# EAGLE board 13777-ESP32_GPS_Motion_Shield-Panel_v10 (EAGLE 7.7.0), part 1 of 6
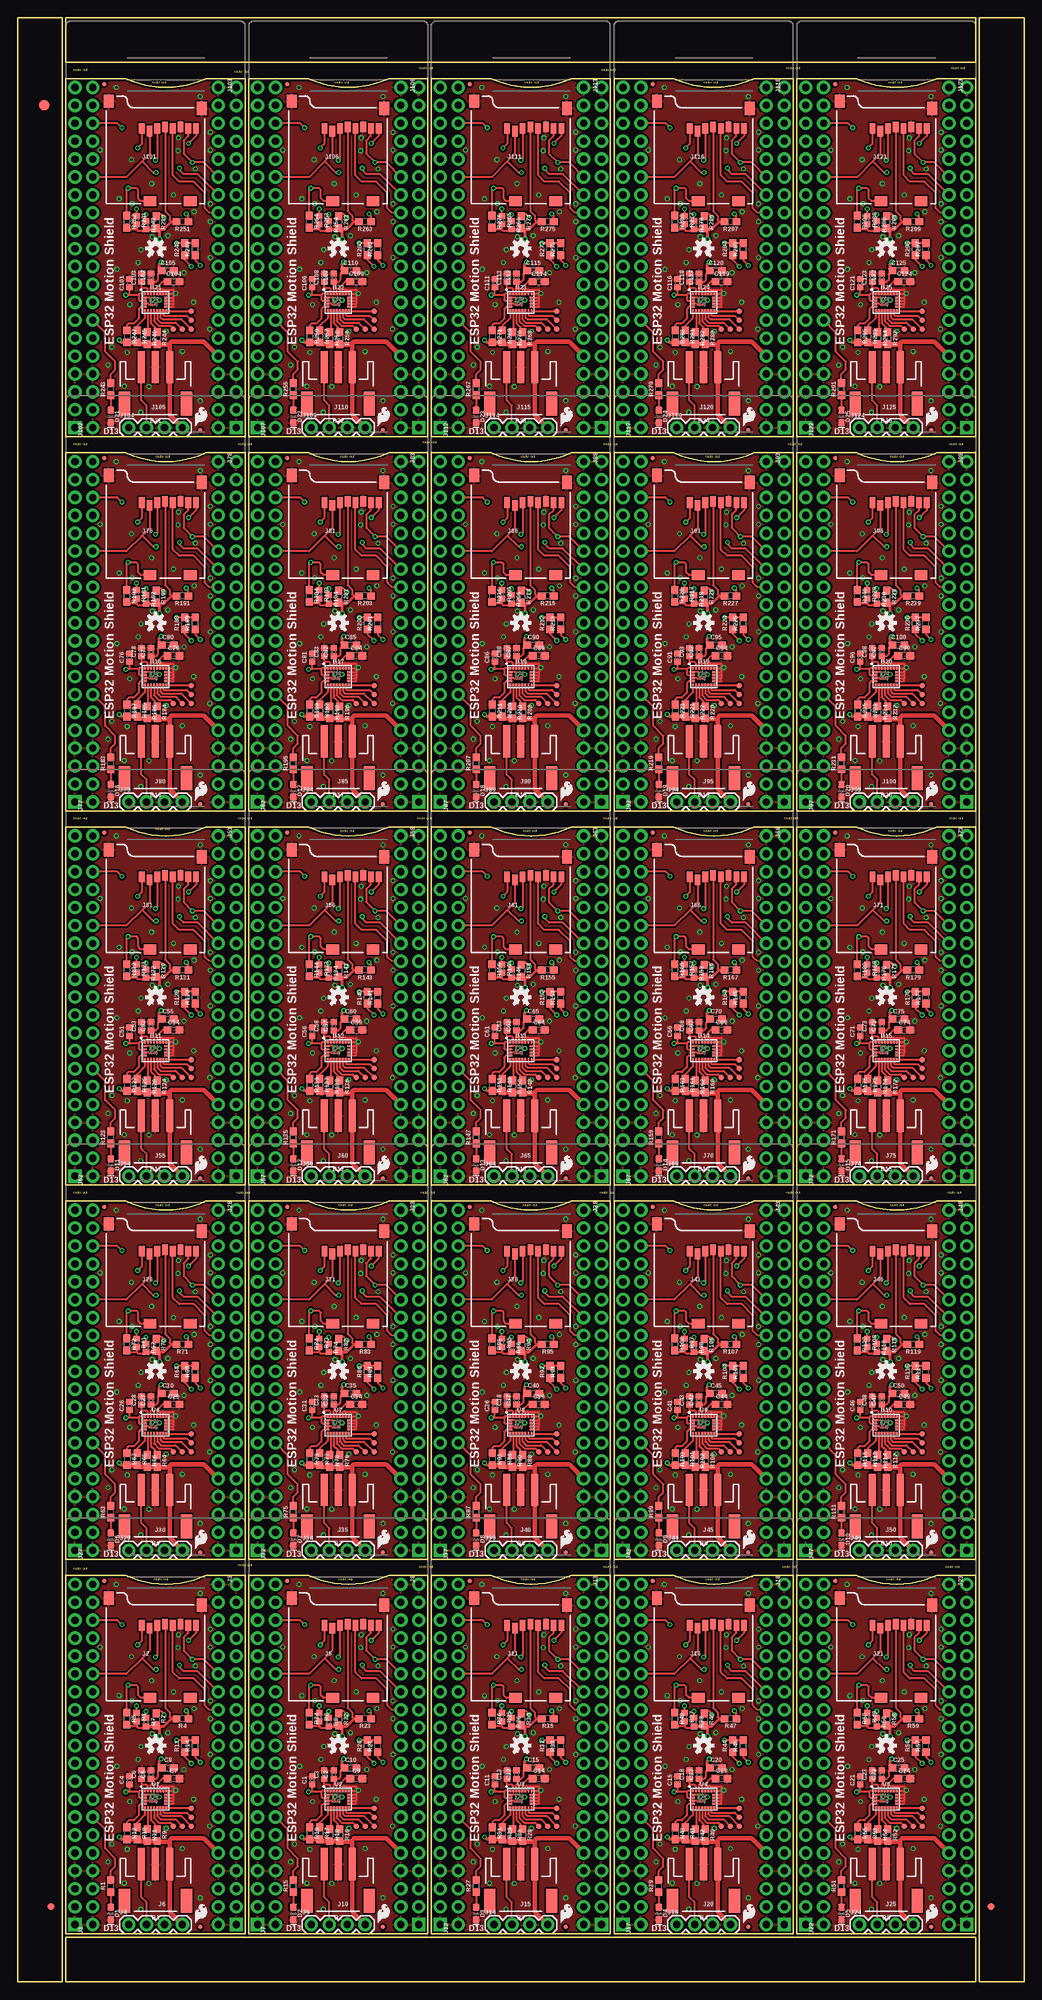
[diagram p0: board, top side]
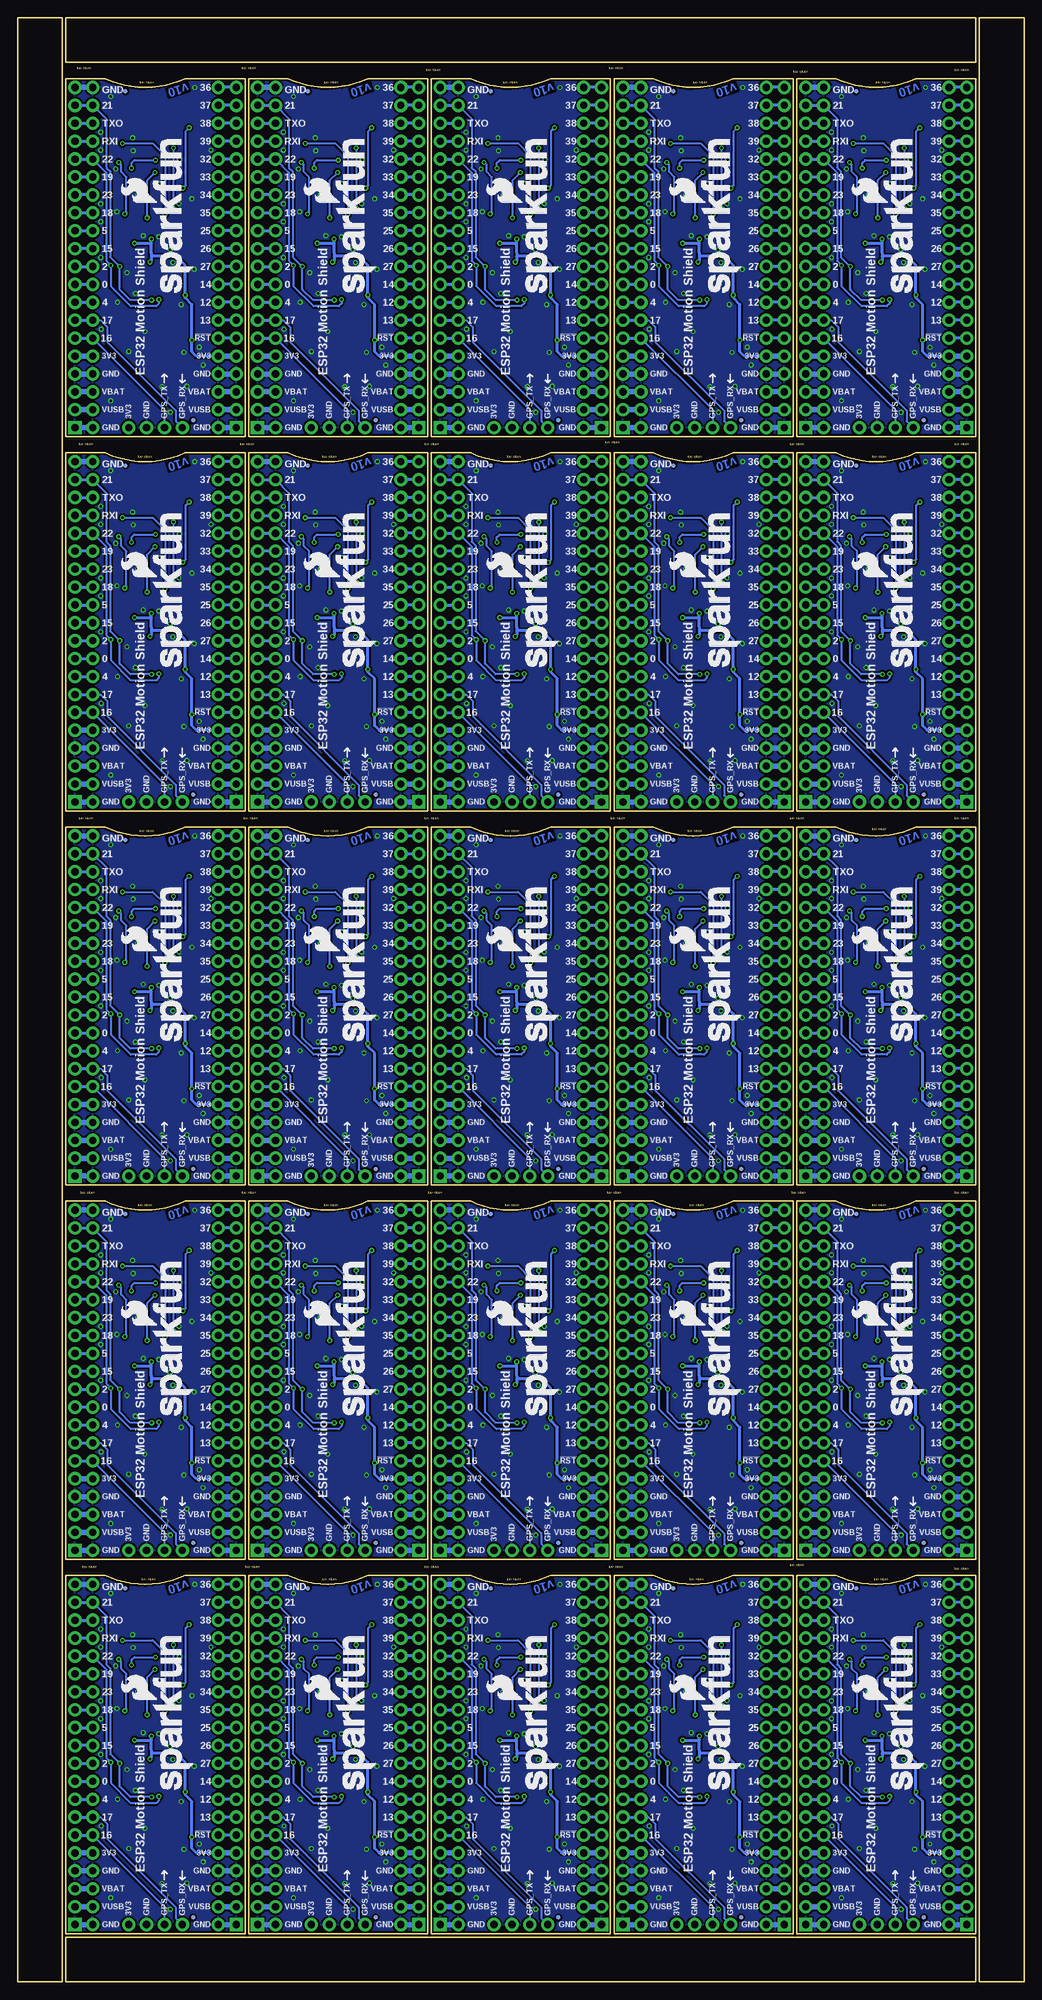
[diagram p1: board, bottom side, seen from below]

Size 142.75 x 278.64 mm. Coordinates in mm from the lower left corner, seen from the top.
Outline: 224 segments
Copper layers (1*16): Top 0.035mm / dielectric 1.5mm / Bottom 0.035mm
Design rules "SparkFun-2-layer-TIGHT *": minimum track width 7mil, minimum drill 13mil, track to track 7mil, track to pad 7mil, pad to pad 7mil, via to via 7mil, smd to smd 7mil, copper to edge 7mil, drill to drill 7mil, minimum pad ring 7mil, minimum via ring 7mil, stop-mask expansion 4mil, vias tented up to drill 25mil, thermal gap 10mil

## Footprints (pad centres in the part's own frame; a part is rotated, then mirrored left to right if it is on the bottom)
ESP32_THING_NO_ANT = drill 1.016 pad 1.88 square: 1 1.27,1.27; 40 24.13,1.27 | drill 1.016 pad 1.88: 2 1.27,3.81; 3 1.27,6.35; 4 1.27,8.89; 5 1.27,11.43; 6 1.27,13.97; 7 1.27,16.51; 8 1.27,19.05; 9 1.27,21.59; 10 1.27,24.13; 11 1.27,26.67; 12 1.27,29.21; 13 1.27,31.75; 14 1.27,34.29; 15 1.27,36.83; 16 1.27,39.37; 17 1.27,41.91; 18 1.27,44.45; 19 1.27,46.99; 20 1.27,49.53; 21 24.13,49.53; 22 24.13,46.99; 23 24.13,44.45; 24 24.13,41.91; 25 24.13,39.37; 26 24.13,36.83; 27 24.13,34.29; 28 24.13,31.75; 29 24.13,29.21; 30 24.13,26.67; 31 24.13,24.13; 32 24.13,21.59; 33 24.13,19.05; 34 24.13,16.51; 35 24.13,13.97; 36 24.13,11.43; 37 24.13,8.89; 38 24.13,6.35; 39 24.13,3.81
0402 = smd 0.85 x 0.9: 1 -0.58,0; 2 0.58,0
0603 = smd 1.1 x 1: 1 -0.85,0; 2 0.85,0
LED-0603 = smd 1 x 1: A -0.877,0; C 0.877,0
FIDUCIAL-1X2 = smd 1 x 1: 1 0,0
FIDUCIAL-1.5X3 = smd 1.5 x 1.5: 1 0,0
FIDUCIAL-MICRO = smd 0.635 x 0.635: 1 0,0
1X20_NOSILK = drill 1.016 pad 1.88: 1 0,0; 2 2.54,0; 3 5.08,0; 4 7.62,0; 5 10.16,0; 6 12.7,0; 7 15.24,0; 8 17.78,0; 9 20.32,0; 10 22.86,0; 11 25.4,0; 12 27.94,0; 13 30.48,0; 14 33.02,0; 15 35.56,0; 16 38.1,0; 17 40.64,0; 18 43.18,0; 19 45.72,0; 20 48.26,0
MICRO-SD-SOCKET = smd 1.8 x 1.4: CD1 -2.05,0.4; CD2 -7.75,0.4 | smd 0.8 x 1.5: CS -7.84,10.3; DI -6.74,10.7; DO -2.34,10.7; GND -3.44,10.9; RSV1 -8.94,10.7; RSV2 -1.24,10.7; SCLK -4.54,10.7; VCC -5.64,10.9 | smd 1.4 x 1.9: GND1 -13.6,14.55; GND3 -0.45,13.55
1X04 = drill 1.016 pad 1.88: 1 0,0; 2 2.54,0; 3 5.08,0; 4 7.62,0
JST-3-SMD = smd 1 x 4.6: 1 2.01,-4.77; 2 0.01,-4.77; 3 -1.99,-4.77 | smd 1.6 x 3.4: NC1 -4.39,0.43; NC2 4.41,0.43
PAD.03X.03 = smd 0.762 x 0.762: P$1 0,0
LGA-24-3.5X3 = smd 0.27 x 0.45: 1 -1.505,1.225; 6 -1.505,-1.225; 7 -1.075,-1.225; 8 -0.645,-1.225; 9 -0.215,-1.225; 10 0.215,-1.225; 11 0.645,-1.225; 12 1.075,-1.225; 13 1.505,-1.225; 18 1.505,1.225; 19 1.075,1.225; 20 0.645,1.225; 21 0.215,1.225; 22 -0.215,1.225; 23 -0.645,1.225; 24 -1.075,1.225 | smd 0.45 x 0.27: 2 -1.475,0.645; 3 -1.475,0.215; 4 -1.475,-0.215; 5 -1.475,-0.645; 14 1.475,-0.645; 15 1.475,-0.215; 16 1.475,0.215; 17 1.475,0.645

## Placement (x,y rotation side)
B1  ESP32_THING_WO_ANT_KEEPOUT  [ESP32_THING_NO_ANT]  6.86,6.86 0 top
B2  ESP32_THING_WO_ANT_KEEPOUT  [ESP32_THING_NO_ANT]  32.77,6.86 0 top
B3  ESP32_THING_WO_ANT_KEEPOUT  [ESP32_THING_NO_ANT]  58.67,6.86 0 top
B4  ESP32_THING_WO_ANT_KEEPOUT  [ESP32_THING_NO_ANT]  84.58,6.86 0 top
B5  ESP32_THING_WO_ANT_KEEPOUT  [ESP32_THING_NO_ANT]  110.49,6.86 0 top
B6  ESP32_THING_WO_ANT_KEEPOUT  [ESP32_THING_NO_ANT]  6.86,59.94 0 top
B7  ESP32_THING_WO_ANT_KEEPOUT  [ESP32_THING_NO_ANT]  32.77,59.94 0 top
B8  ESP32_THING_WO_ANT_KEEPOUT  [ESP32_THING_NO_ANT]  58.67,59.94 0 top
B9  ESP32_THING_WO_ANT_KEEPOUT  [ESP32_THING_NO_ANT]  84.58,59.94 0 top
B10  ESP32_THING_WO_ANT_KEEPOUT  [ESP32_THING_NO_ANT]  110.49,59.94 0 top
B11  ESP32_THING_WO_ANT_KEEPOUT  [ESP32_THING_NO_ANT]  6.86,113.03 0 top
B12  ESP32_THING_WO_ANT_KEEPOUT  [ESP32_THING_NO_ANT]  32.77,113.03 0 top
B13  ESP32_THING_WO_ANT_KEEPOUT  [ESP32_THING_NO_ANT]  58.67,113.03 0 top
B14  ESP32_THING_WO_ANT_KEEPOUT  [ESP32_THING_NO_ANT]  84.58,113.03 0 top
B15  ESP32_THING_WO_ANT_KEEPOUT  [ESP32_THING_NO_ANT]  110.49,113.03 0 top
B16  ESP32_THING_WO_ANT_KEEPOUT  [ESP32_THING_NO_ANT]  6.86,166.12 0 top
B17  ESP32_THING_WO_ANT_KEEPOUT  [ESP32_THING_NO_ANT]  32.77,166.12 0 top
B18  ESP32_THING_WO_ANT_KEEPOUT  [ESP32_THING_NO_ANT]  58.67,166.12 0 top
B19  ESP32_THING_WO_ANT_KEEPOUT  [ESP32_THING_NO_ANT]  84.58,166.12 0 top
B20  ESP32_THING_WO_ANT_KEEPOUT  [ESP32_THING_NO_ANT]  110.49,166.12 0 top
B21  ESP32_THING_WO_ANT_KEEPOUT  [ESP32_THING_NO_ANT]  6.86,219.2 0 top
B22  ESP32_THING_WO_ANT_KEEPOUT  [ESP32_THING_NO_ANT]  32.77,219.2 0 top
B23  ESP32_THING_WO_ANT_KEEPOUT  [ESP32_THING_NO_ANT]  58.67,219.2 0 top
B24  ESP32_THING_WO_ANT_KEEPOUT  [ESP32_THING_NO_ANT]  84.58,219.2 0 top
B25  ESP32_THING_WO_ANT_KEEPOUT  [ESP32_THING_NO_ANT]  110.49,219.2 0 top
C1  0.1uF  [0402]  41.78,28.61 90 top
C2  0.1uF  [0402]  44.83,29.4 90 top
C3  0.1uF  [0402]  43.48,29.4 90 top
C4  0.1uF  [0402]  15.87,28.61 90 top
C5  0.1uF  [0402]  18.92,29.4 90 top
C6  0.1uF  [0402]  17.57,29.4 90 top
C7  10nF  [0603]  22.1,28.84 0 top
C8  10uF  [0603]  21.3,30.39 0 top
C9  10nF  [0603]  48.01,28.84 0 top
C10  10uF  [0603]  47.21,30.39 0 top
C11  0.1uF  [0402]  67.68,28.61 90 top
C12  0.1uF  [0402]  70.74,29.4 90 top
C13  0.1uF  [0402]  69.39,29.4 90 top
C14  10nF  [0603]  73.91,28.84 0 top
C15  10uF  [0603]  73.12,30.39 0 top
C16  0.1uF  [0402]  93.59,28.61 90 top
C17  0.1uF  [0402]  96.65,29.4 90 top
C18  0.1uF  [0402]  95.3,29.4 90 top
C19  10nF  [0603]  99.82,28.84 0 top
C20  10uF  [0603]  99.03,30.39 0 top
C21  0.1uF  [0402]  119.5,28.61 90 top
C22  0.1uF  [0402]  122.56,29.4 90 top
C23  0.1uF  [0402]  121.21,29.4 90 top
C24  10nF  [0603]  125.73,28.84 0 top
C25  10uF  [0603]  124.94,30.39 0 top
C26  0.1uF  [0402]  15.87,81.69 90 top
C27  0.1uF  [0402]  18.92,82.49 90 top
C28  0.1uF  [0402]  17.57,82.49 90 top
C29  10nF  [0603]  22.1,81.93 0 top
C30  10uF  [0603]  21.3,83.48 0 top
C31  0.1uF  [0402]  41.78,81.69 90 top
C32  0.1uF  [0402]  44.83,82.49 90 top
C33  0.1uF  [0402]  43.48,82.49 90 top
C34  10nF  [0603]  48.01,81.93 0 top
C35  10uF  [0603]  47.21,83.48 0 top
C36  0.1uF  [0402]  67.68,81.69 90 top
C37  0.1uF  [0402]  70.74,82.49 90 top
C38  0.1uF  [0402]  69.39,82.49 90 top
C39  10nF  [0603]  73.91,81.93 0 top
C40  10uF  [0603]  73.12,83.48 0 top
C41  0.1uF  [0402]  93.59,81.69 90 top
C42  0.1uF  [0402]  96.65,82.49 90 top
C43  0.1uF  [0402]  95.3,82.49 90 top
C44  10nF  [0603]  99.82,81.93 0 top
C45  10uF  [0603]  99.03,83.48 0 top
C46  0.1uF  [0402]  119.5,81.69 90 top
C47  0.1uF  [0402]  122.56,82.49 90 top
C48  0.1uF  [0402]  121.21,82.49 90 top
C49  10nF  [0603]  125.73,81.93 0 top
C50  10uF  [0603]  124.94,83.48 0 top
C51  0.1uF  [0402]  15.87,134.78 90 top
C52  0.1uF  [0402]  18.92,135.57 90 top
C53  0.1uF  [0402]  17.57,135.57 90 top
C54  10nF  [0603]  22.1,135.02 0 top
C55  10uF  [0603]  21.3,136.56 0 top
C56  0.1uF  [0402]  41.78,134.78 90 top
C57  0.1uF  [0402]  44.83,135.57 90 top
C58  0.1uF  [0402]  43.48,135.57 90 top
C59  10nF  [0603]  48.01,135.02 0 top
C60  10uF  [0603]  47.21,136.56 0 top
C61  0.1uF  [0402]  67.68,134.78 90 top
C62  0.1uF  [0402]  70.74,135.57 90 top
C63  0.1uF  [0402]  69.39,135.57 90 top
C64  10nF  [0603]  73.91,135.02 0 top
C65  10uF  [0603]  73.12,136.56 0 top
C66  0.1uF  [0402]  93.59,134.78 90 top
C67  0.1uF  [0402]  96.65,135.57 90 top
C68  0.1uF  [0402]  95.3,135.57 90 top
C69  10nF  [0603]  99.82,135.02 0 top
C70  10uF  [0603]  99.03,136.56 0 top
C71  0.1uF  [0402]  119.5,134.78 90 top
C72  0.1uF  [0402]  122.56,135.57 90 top
C73  0.1uF  [0402]  121.21,135.57 90 top
C74  10nF  [0603]  125.73,135.02 0 top
C75  10uF  [0603]  124.94,136.56 0 top
C76  0.1uF  [0402]  15.87,187.86 90 top
C77  0.1uF  [0402]  18.92,188.66 90 top
C78  0.1uF  [0402]  17.57,188.66 90 top
C79  10nF  [0603]  22.1,188.1 0 top
C80  10uF  [0603]  21.3,189.65 0 top
C81  0.1uF  [0402]  41.78,187.86 90 top
C82  0.1uF  [0402]  44.83,188.66 90 top
C83  0.1uF  [0402]  43.48,188.66 90 top
C84  10nF  [0603]  48.01,188.1 0 top
C85  10uF  [0603]  47.21,189.65 0 top
C86  0.1uF  [0402]  67.68,187.86 90 top
C87  0.1uF  [0402]  70.74,188.66 90 top
C88  0.1uF  [0402]  69.39,188.66 90 top
C89  10nF  [0603]  73.91,188.1 0 top
C90  10uF  [0603]  73.12,189.65 0 top
C91  0.1uF  [0402]  93.59,187.86 90 top
C92  0.1uF  [0402]  96.65,188.66 90 top
C93  0.1uF  [0402]  95.3,188.66 90 top
C94  10nF  [0603]  99.82,188.1 0 top
C95  10uF  [0603]  99.03,189.65 0 top
C96  0.1uF  [0402]  119.5,187.86 90 top
C97  0.1uF  [0402]  122.56,188.66 90 top
C98  0.1uF  [0402]  121.21,188.66 90 top
C99  10nF  [0603]  125.73,188.1 0 top
C100  10uF  [0603]  124.94,189.65 0 top
C101  0.1uF  [0402]  15.87,240.95 90 top
C102  0.1uF  [0402]  18.92,241.74 90 top
C103  0.1uF  [0402]  17.57,241.74 90 top
C104  10nF  [0603]  22.1,241.19 0 top
C105  10uF  [0603]  21.3,242.74 0 top
C106  0.1uF  [0402]  41.78,240.95 90 top
C107  0.1uF  [0402]  44.83,241.74 90 top
C108  0.1uF  [0402]  43.48,241.74 90 top
C109  10nF  [0603]  48.01,241.19 0 top
C110  10uF  [0603]  47.21,242.74 0 top
C111  0.1uF  [0402]  67.68,240.95 90 top
C112  0.1uF  [0402]  70.74,241.74 90 top
C113  0.1uF  [0402]  69.39,241.74 90 top
C114  10nF  [0603]  73.91,241.19 0 top
C115  10uF  [0603]  73.12,242.74 0 top
C116  0.1uF  [0402]  93.59,240.95 90 top
C117  0.1uF  [0402]  96.65,241.74 90 top
C118  0.1uF  [0402]  95.3,241.74 90 top
C119  10nF  [0603]  99.82,241.19 0 top
C120  10uF  [0603]  99.03,242.74 0 top
C121  0.1uF  [0402]  119.5,240.95 90 top
C122  0.1uF  [0402]  122.56,241.74 90 top
C123  0.1uF  [0402]  121.21,241.74 90 top
C124  10nF  [0603]  125.73,241.19 0 top
C125  10uF  [0603]  124.94,242.74 0 top
D1  BLUE  [LED-0603]  13.21,9.72 270 top
D2  BLUE  [LED-0603]  39.12,9.72 270 top
D3  BLUE  [LED-0603]  65.02,9.72 270 top
D4  BLUE  [LED-0603]  90.93,9.72 270 top
D5  BLUE  [LED-0603]  116.84,9.72 270 top
D6  BLUE  [LED-0603]  13.21,62.8 270 top
D7  BLUE  [LED-0603]  39.12,62.8 270 top
D8  BLUE  [LED-0603]  65.02,62.8 270 top
D9  BLUE  [LED-0603]  90.93,62.8 270 top
D10  BLUE  [LED-0603]  116.84,62.8 270 top
D11  BLUE  [LED-0603]  13.21,115.89 270 top
D12  BLUE  [LED-0603]  39.12,115.89 270 top
D13  BLUE  [LED-0603]  65.02,115.89 270 top
D14  BLUE  [LED-0603]  90.93,115.89 270 top
D15  BLUE  [LED-0603]  116.84,115.89 270 top
D16  BLUE  [LED-0603]  13.21,168.97 270 top
D17  BLUE  [LED-0603]  39.12,168.97 270 top
D18  BLUE  [LED-0603]  65.02,168.97 270 top
D19  BLUE  [LED-0603]  90.93,168.97 270 top
D20  BLUE  [LED-0603]  116.84,168.97 270 top
D21  BLUE  [LED-0603]  13.21,222.06 270 top
D22  BLUE  [LED-0603]  39.12,222.06 270 top
D23  BLUE  [LED-0603]  65.02,222.06 270 top
D24  BLUE  [LED-0603]  90.93,222.06 270 top
D25  BLUE  [LED-0603]  116.84,222.06 270 top
E$1  [FIDUCIAL-1X2]  4.7,10.67 0 top
E$2  [FIDUCIAL-1X2]  138.05,10.67 180 top
E$3  [FIDUCIAL-1.5X3]  3.81,266.19 0 top
FD1  FIDUCIALUFIDUCIAL  [FIDUCIAL-MICRO]  25.91,7.81 0 top
FD2  FIDUCIALUFIDUCIAL  [FIDUCIAL-MICRO]  12.32,56.86 0 top
FD3  FIDUCIALUFIDUCIAL  [FIDUCIAL-MICRO]  23.84,55.83 0 bottom
FD4  FIDUCIALUFIDUCIAL  [FIDUCIAL-MICRO]  14.24,9.16 0 bottom
FD5  FIDUCIALUFIDUCIAL  [FIDUCIAL-MICRO]  51.82,7.81 0 top
FD6  FIDUCIALUFIDUCIAL  [FIDUCIAL-MICRO]  38.23,56.86 0 top
FD7  FIDUCIALUFIDUCIAL  [FIDUCIAL-MICRO]  49.75,55.83 0 bottom
FD8  FIDUCIALUFIDUCIAL  [FIDUCIAL-MICRO]  40.15,9.16 0 bottom
FD9  FIDUCIALUFIDUCIAL  [FIDUCIAL-MICRO]  77.72,7.81 0 top
FD10  FIDUCIALUFIDUCIAL  [FIDUCIAL-MICRO]  64.14,56.86 0 top
FD11  FIDUCIALUFIDUCIAL  [FIDUCIAL-MICRO]  75.66,55.83 0 bottom
FD12  FIDUCIALUFIDUCIAL  [FIDUCIAL-MICRO]  66.06,9.16 0 bottom
FD13  FIDUCIALUFIDUCIAL  [FIDUCIAL-MICRO]  103.63,7.81 0 top
FD14  FIDUCIALUFIDUCIAL  [FIDUCIAL-MICRO]  90.04,56.86 0 top
FD15  FIDUCIALUFIDUCIAL  [FIDUCIAL-MICRO]  101.57,55.83 0 bottom
FD16  FIDUCIALUFIDUCIAL  [FIDUCIAL-MICRO]  91.96,9.16 0 bottom
FD17  FIDUCIALUFIDUCIAL  [FIDUCIAL-MICRO]  129.54,7.81 0 top
FD18  FIDUCIALUFIDUCIAL  [FIDUCIAL-MICRO]  115.95,56.86 0 top
FD19  FIDUCIALUFIDUCIAL  [FIDUCIAL-MICRO]  127.48,55.83 0 bottom
FD20  FIDUCIALUFIDUCIAL  [FIDUCIAL-MICRO]  117.87,9.16 0 bottom
FD21  FIDUCIALUFIDUCIAL  [FIDUCIAL-MICRO]  25.91,60.9 0 top
FD22  FIDUCIALUFIDUCIAL  [FIDUCIAL-MICRO]  12.32,109.95 0 top
FD23  FIDUCIALUFIDUCIAL  [FIDUCIAL-MICRO]  23.84,108.92 0 bottom
FD24  FIDUCIALUFIDUCIAL  [FIDUCIAL-MICRO]  14.24,62.25 0 bottom
FD25  FIDUCIALUFIDUCIAL  [FIDUCIAL-MICRO]  51.82,60.9 0 top
FD26  FIDUCIALUFIDUCIAL  [FIDUCIAL-MICRO]  38.23,109.95 0 top
FD27  FIDUCIALUFIDUCIAL  [FIDUCIAL-MICRO]  49.75,108.92 0 bottom
FD28  FIDUCIALUFIDUCIAL  [FIDUCIAL-MICRO]  40.15,62.25 0 bottom
FD29  FIDUCIALUFIDUCIAL  [FIDUCIAL-MICRO]  77.72,60.9 0 top
FD30  FIDUCIALUFIDUCIAL  [FIDUCIAL-MICRO]  64.14,109.95 0 top
FD31  FIDUCIALUFIDUCIAL  [FIDUCIAL-MICRO]  75.66,108.92 0 bottom
FD32  FIDUCIALUFIDUCIAL  [FIDUCIAL-MICRO]  66.06,62.25 0 bottom
FD33  FIDUCIALUFIDUCIAL  [FIDUCIAL-MICRO]  103.63,60.9 0 top
FD34  FIDUCIALUFIDUCIAL  [FIDUCIAL-MICRO]  90.04,109.95 0 top
FD35  FIDUCIALUFIDUCIAL  [FIDUCIAL-MICRO]  101.57,108.92 0 bottom
FD36  FIDUCIALUFIDUCIAL  [FIDUCIAL-MICRO]  91.96,62.25 0 bottom
FD37  FIDUCIALUFIDUCIAL  [FIDUCIAL-MICRO]  129.54,60.9 0 top
FD38  FIDUCIALUFIDUCIAL  [FIDUCIAL-MICRO]  115.95,109.95 0 top
FD39  FIDUCIALUFIDUCIAL  [FIDUCIAL-MICRO]  127.48,108.92 0 bottom
FD40  FIDUCIALUFIDUCIAL  [FIDUCIAL-MICRO]  117.87,62.25 0 bottom
FD41  FIDUCIALUFIDUCIAL  [FIDUCIAL-MICRO]  25.91,113.98 0 top
FD42  FIDUCIALUFIDUCIAL  [FIDUCIAL-MICRO]  12.32,163.04 0 top
FD43  FIDUCIALUFIDUCIAL  [FIDUCIAL-MICRO]  23.84,162 0 bottom
FD44  FIDUCIALUFIDUCIAL  [FIDUCIAL-MICRO]  14.24,115.33 0 bottom
FD45  FIDUCIALUFIDUCIAL  [FIDUCIAL-MICRO]  51.82,113.98 0 top
FD46  FIDUCIALUFIDUCIAL  [FIDUCIAL-MICRO]  38.23,163.04 0 top
FD47  FIDUCIALUFIDUCIAL  [FIDUCIAL-MICRO]  49.75,162 0 bottom
FD48  FIDUCIALUFIDUCIAL  [FIDUCIAL-MICRO]  40.15,115.33 0 bottom
FD49  FIDUCIALUFIDUCIAL  [FIDUCIAL-MICRO]  77.72,113.98 0 top
FD50  FIDUCIALUFIDUCIAL  [FIDUCIAL-MICRO]  64.14,163.04 0 top
FD51  FIDUCIALUFIDUCIAL  [FIDUCIAL-MICRO]  75.66,162 0 bottom
FD52  FIDUCIALUFIDUCIAL  [FIDUCIAL-MICRO]  66.06,115.33 0 bottom
FD53  FIDUCIALUFIDUCIAL  [FIDUCIAL-MICRO]  103.63,113.98 0 top
FD54  FIDUCIALUFIDUCIAL  [FIDUCIAL-MICRO]  90.04,163.04 0 top
FD55  FIDUCIALUFIDUCIAL  [FIDUCIAL-MICRO]  101.57,162 0 bottom
FD56  FIDUCIALUFIDUCIAL  [FIDUCIAL-MICRO]  91.96,115.33 0 bottom
FD57  FIDUCIALUFIDUCIAL  [FIDUCIAL-MICRO]  129.54,113.98 0 top
FD58  FIDUCIALUFIDUCIAL  [FIDUCIAL-MICRO]  115.95,163.04 0 top
FD59  FIDUCIALUFIDUCIAL  [FIDUCIAL-MICRO]  127.48,162 0 bottom
FD60  FIDUCIALUFIDUCIAL  [FIDUCIAL-MICRO]  117.87,115.33 0 bottom
FD61  FIDUCIALUFIDUCIAL  [FIDUCIAL-MICRO]  25.91,167.07 0 top
FD62  FIDUCIALUFIDUCIAL  [FIDUCIAL-MICRO]  12.32,216.12 0 top
FD63  FIDUCIALUFIDUCIAL  [FIDUCIAL-MICRO]  23.84,215.09 0 bottom
FD64  FIDUCIALUFIDUCIAL  [FIDUCIAL-MICRO]  14.24,168.42 0 bottom
FD65  FIDUCIALUFIDUCIAL  [FIDUCIAL-MICRO]  51.82,167.07 0 top
FD66  FIDUCIALUFIDUCIAL  [FIDUCIAL-MICRO]  38.23,216.12 0 top
FD67  FIDUCIALUFIDUCIAL  [FIDUCIAL-MICRO]  49.75,215.09 0 bottom
FD68  FIDUCIALUFIDUCIAL  [FIDUCIAL-MICRO]  40.15,168.42 0 bottom
FD69  FIDUCIALUFIDUCIAL  [FIDUCIAL-MICRO]  77.72,167.07 0 top
FD70  FIDUCIALUFIDUCIAL  [FIDUCIAL-MICRO]  64.14,216.12 0 top
FD71  FIDUCIALUFIDUCIAL  [FIDUCIAL-MICRO]  75.66,215.09 0 bottom
FD72  FIDUCIALUFIDUCIAL  [FIDUCIAL-MICRO]  66.06,168.42 0 bottom
FD73  FIDUCIALUFIDUCIAL  [FIDUCIAL-MICRO]  103.63,167.07 0 top
FD74  FIDUCIALUFIDUCIAL  [FIDUCIAL-MICRO]  90.04,216.12 0 top
FD75  FIDUCIALUFIDUCIAL  [FIDUCIAL-MICRO]  101.57,215.09 0 bottom
FD76  FIDUCIALUFIDUCIAL  [FIDUCIAL-MICRO]  91.96,168.42 0 bottom
FD77  FIDUCIALUFIDUCIAL  [FIDUCIAL-MICRO]  129.54,167.07 0 top
FD78  FIDUCIALUFIDUCIAL  [FIDUCIAL-MICRO]  115.95,216.12 0 top
FD79  FIDUCIALUFIDUCIAL  [FIDUCIAL-MICRO]  127.48,215.09 0 bottom
FD80  FIDUCIALUFIDUCIAL  [FIDUCIAL-MICRO]  117.87,168.42 0 bottom
FD81  FIDUCIALUFIDUCIAL  [FIDUCIAL-MICRO]  25.91,220.15 0 top
FD82  FIDUCIALUFIDUCIAL  [FIDUCIAL-MICRO]  12.32,269.21 0 top
FD83  FIDUCIALUFIDUCIAL  [FIDUCIAL-MICRO]  23.84,268.18 0 bottom
FD84  FIDUCIALUFIDUCIAL  [FIDUCIAL-MICRO]  14.24,221.5 0 bottom
FD85  FIDUCIALUFIDUCIAL  [FIDUCIAL-MICRO]  51.82,220.15 0 top
FD86  FIDUCIALUFIDUCIAL  [FIDUCIAL-MICRO]  38.23,269.21 0 top
FD87  FIDUCIALUFIDUCIAL  [FIDUCIAL-MICRO]  49.75,268.18 0 bottom
FD88  FIDUCIALUFIDUCIAL  [FIDUCIAL-MICRO]  40.15,221.5 0 bottom
FD89  FIDUCIALUFIDUCIAL  [FIDUCIAL-MICRO]  77.72,220.15 0 top
FD90  FIDUCIALUFIDUCIAL  [FIDUCIAL-MICRO]  64.14,269.21 0 top
FD91  FIDUCIALUFIDUCIAL  [FIDUCIAL-MICRO]  75.66,268.18 0 bottom
FD92  FIDUCIALUFIDUCIAL  [FIDUCIAL-MICRO]  66.06,221.5 0 bottom
FD93  FIDUCIALUFIDUCIAL  [FIDUCIAL-MICRO]  103.63,220.15 0 top
FD94  FIDUCIALUFIDUCIAL  [FIDUCIAL-MICRO]  90.04,269.21 0 top
FD95  FIDUCIALUFIDUCIAL  [FIDUCIAL-MICRO]  101.57,268.18 0 bottom
FD96  FIDUCIALUFIDUCIAL  [FIDUCIAL-MICRO]  91.96,221.5 0 bottom
FD97  FIDUCIALUFIDUCIAL  [FIDUCIAL-MICRO]  129.54,220.15 0 top
FD98  FIDUCIALUFIDUCIAL  [FIDUCIAL-MICRO]  115.95,269.21 0 top
FD99  FIDUCIALUFIDUCIAL  [FIDUCIAL-MICRO]  127.48,268.18 0 bottom
FD100  FIDUCIALUFIDUCIAL  [FIDUCIAL-MICRO]  117.87,221.5 0 bottom
J1  [1X20_NOSILK]  10.67,8.13 90 top
J2  MICRO-SD_CARD_SOCKET  [MICRO-SD-SOCKET]  26.54,39.88 0 top
J3  [1X20_NOSILK]  28.45,56.39 270 top
J4  [1X04]  15.75,8.13 0 top
J5  MICRO-SD_CARD_SOCKET  [MICRO-SD-SOCKET]  52.45,39.88 0 top
J6  3-PIN SMD  [JST-3-SMD]  19.56,11.94 180 top
J7  [1X20_NOSILK]  36.58,8.13 90 top
J8  [1X20_NOSILK]  54.36,56.39 270 top
J9  [1X04]  41.66,8.13 0 top
J10  3-PIN SMD  [JST-3-SMD]  45.47,11.94 180 top
J11  MICRO-SD_CARD_SOCKET  [MICRO-SD-SOCKET]  78.36,39.88 0 top
J12  [1X20_NOSILK]  62.48,8.13 90 top
J13  [1X20_NOSILK]  80.26,56.39 270 top
J14  [1X04]  67.56,8.13 0 top
J15  3-PIN SMD  [JST-3-SMD]  71.37,11.94 180 top
J16  MICRO-SD_CARD_SOCKET  [MICRO-SD-SOCKET]  104.27,39.88 0 top
J17  [1X20_NOSILK]  88.39,8.13 90 top
J18  [1X20_NOSILK]  106.17,56.39 270 top
J19  [1X04]  93.47,8.13 0 top
J20  3-PIN SMD  [JST-3-SMD]  97.28,11.94 180 top
J21  MICRO-SD_CARD_SOCKET  [MICRO-SD-SOCKET]  130.18,39.88 0 top
J22  [1X20_NOSILK]  114.3,8.13 90 top
J23  [1X20_NOSILK]  132.08,56.39 270 top
J24  [1X04]  119.38,8.13 0 top
J25  3-PIN SMD  [JST-3-SMD]  123.19,11.94 180 top
J26  MICRO-SD_CARD_SOCKET  [MICRO-SD-SOCKET]  26.54,92.96 0 top
J27  [1X20_NOSILK]  10.67,61.21 90 top
J28  [1X20_NOSILK]  28.45,109.47 270 top
J29  [1X04]  15.75,61.21 0 top
J30  3-PIN SMD  [JST-3-SMD]  19.56,65.02 180 top
J31  MICRO-SD_CARD_SOCKET  [MICRO-SD-SOCKET]  52.45,92.96 0 top
J32  [1X20_NOSILK]  36.58,61.21 90 top
J33  [1X20_NOSILK]  54.36,109.47 270 top
J34  [1X04]  41.66,61.21 0 top
J35  3-PIN SMD  [JST-3-SMD]  45.47,65.02 180 top
J36  MICRO-SD_CARD_SOCKET  [MICRO-SD-SOCKET]  78.36,92.96 0 top
J37  [1X20_NOSILK]  62.48,61.21 90 top
J38  [1X20_NOSILK]  80.26,109.47 270 top
J39  [1X04]  67.56,61.21 0 top
J40  3-PIN SMD  [JST-3-SMD]  71.37,65.02 180 top
J41  MICRO-SD_CARD_SOCKET  [MICRO-SD-SOCKET]  104.27,92.96 0 top
J42  [1X20_NOSILK]  88.39,61.21 90 top
J43  [1X20_NOSILK]  106.17,109.47 270 top
J44  [1X04]  93.47,61.21 0 top
J45  3-PIN SMD  [JST-3-SMD]  97.28,65.02 180 top
J46  MICRO-SD_CARD_SOCKET  [MICRO-SD-SOCKET]  130.18,92.96 0 top
J47  [1X20_NOSILK]  114.3,61.21 90 top
J48  [1X20_NOSILK]  132.08,109.47 270 top
J49  [1X04]  119.38,61.21 0 top
J50  3-PIN SMD  [JST-3-SMD]  123.19,65.02 180 top
J51  MICRO-SD_CARD_SOCKET  [MICRO-SD-SOCKET]  26.54,146.05 0 top
J52  [1X20_NOSILK]  10.67,114.3 90 top
J53  [1X20_NOSILK]  28.45,162.56 270 top
J54  [1X04]  15.75,114.3 0 top
J55  3-PIN SMD  [JST-3-SMD]  19.56,118.11 180 top
J56  MICRO-SD_CARD_SOCKET  [MICRO-SD-SOCKET]  52.45,146.05 0 top
J57  [1X20_NOSILK]  36.58,114.3 90 top
J58  [1X20_NOSILK]  54.36,162.56 270 top
J59  [1X04]  41.66,114.3 0 top
J60  3-PIN SMD  [JST-3-SMD]  45.47,118.11 180 top
J61  MICRO-SD_CARD_SOCKET  [MICRO-SD-SOCKET]  78.36,146.05 0 top
J62  [1X20_NOSILK]  62.48,114.3 90 top
J63  [1X20_NOSILK]  80.26,162.56 270 top
J64  [1X04]  67.56,114.3 0 top
J65  3-PIN SMD  [JST-3-SMD]  71.37,118.11 180 top
J66  MICRO-SD_CARD_SOCKET  [MICRO-SD-SOCKET]  104.27,146.05 0 top
J67  [1X20_NOSILK]  88.39,114.3 90 top
J68  [1X20_NOSILK]  106.17,162.56 270 top
J69  [1X04]  93.47,114.3 0 top
J70  3-PIN SMD  [JST-3-SMD]  97.28,118.11 180 top
J71  MICRO-SD_CARD_SOCKET  [MICRO-SD-SOCKET]  130.18,146.05 0 top
J72  [1X20_NOSILK]  114.3,114.3 90 top
J73  [1X20_NOSILK]  132.08,162.56 270 top
J74  [1X04]  119.38,114.3 0 top
J75  3-PIN SMD  [JST-3-SMD]  123.19,118.11 180 top
J76  MICRO-SD_CARD_SOCKET  [MICRO-SD-SOCKET]  26.54,199.14 0 top
J77  [1X20_NOSILK]  10.67,167.39 90 top
J78  [1X20_NOSILK]  28.45,215.65 270 top
J79  [1X04]  15.75,167.39 0 top
J80  3-PIN SMD  [JST-3-SMD]  19.56,171.2 180 top
J81  MICRO-SD_CARD_SOCKET  [MICRO-SD-SOCKET]  52.45,199.14 0 top
J82  [1X20_NOSILK]  36.58,167.39 90 top
J83  [1X20_NOSILK]  54.36,215.65 270 top
J84  [1X04]  41.66,167.39 0 top
J85  3-PIN SMD  [JST-3-SMD]  45.47,171.2 180 top
J86  MICRO-SD_CARD_SOCKET  [MICRO-SD-SOCKET]  78.36,199.14 0 top
J87  [1X20_NOSILK]  62.48,167.39 90 top
J88  [1X20_NOSILK]  80.26,215.65 270 top
J89  [1X04]  67.56,167.39 0 top
J90  3-PIN SMD  [JST-3-SMD]  71.37,171.2 180 top
J91  MICRO-SD_CARD_SOCKET  [MICRO-SD-SOCKET]  104.27,199.14 0 top
J92  [1X20_NOSILK]  88.39,167.39 90 top
J93  [1X20_NOSILK]  106.17,215.65 270 top
J94  [1X04]  93.47,167.39 0 top
J95  3-PIN SMD  [JST-3-SMD]  97.28,171.2 180 top
J96  MICRO-SD_CARD_SOCKET  [MICRO-SD-SOCKET]  130.18,199.14 0 top
J97  [1X20_NOSILK]  114.3,167.39 90 top
J98  [1X20_NOSILK]  132.08,215.65 270 top
J99  [1X04]  119.38,167.39 0 top
J100  3-PIN SMD  [JST-3-SMD]  123.19,171.2 180 top
J101  MICRO-SD_CARD_SOCKET  [MICRO-SD-SOCKET]  26.54,252.22 0 top
J102  [1X20_NOSILK]  10.67,220.47 90 top
J103  [1X20_NOSILK]  28.45,268.73 270 top
J104  [1X04]  15.75,220.47 0 top
J105  3-PIN SMD  [JST-3-SMD]  19.56,224.28 180 top
J106  MICRO-SD_CARD_SOCKET  [MICRO-SD-SOCKET]  52.45,252.22 0 top
J107  [1X20_NOSILK]  36.58,220.47 90 top
J108  [1X20_NOSILK]  54.36,268.73 270 top
J109  [1X04]  41.66,220.47 0 top
J110  3-PIN SMD  [JST-3-SMD]  45.47,224.28 180 top
J111  MICRO-SD_CARD_SOCKET  [MICRO-SD-SOCKET]  78.36,252.22 0 top
J112  [1X20_NOSILK]  62.48,220.47 90 top
J113  [1X20_NOSILK]  80.26,268.73 270 top
J114  [1X04]  67.56,220.47 0 top
J115  3-PIN SMD  [JST-3-SMD]  71.37,224.28 180 top
J116  MICRO-SD_CARD_SOCKET  [MICRO-SD-SOCKET]  104.27,252.22 0 top
J117  [1X20_NOSILK]  88.39,220.47 90 top
J118  [1X20_NOSILK]  106.17,268.73 270 top
J119  [1X04]  93.47,220.47 0 top
J120  3-PIN SMD  [JST-3-SMD]  97.28,224.28 180 top
J121  MICRO-SD_CARD_SOCKET  [MICRO-SD-SOCKET]  130.18,252.22 0 top
J122  [1X20_NOSILK]  114.3,220.47 90 top
J123  [1X20_NOSILK]  132.08,268.73 270 top
J124  [1X04]  119.38,220.47 0 top
J125  3-PIN SMD  [JST-3-SMD]  123.19,224.28 180 top
LOGO1  OSHW-LOGOS  [OSHW-LOGO-S]  19.56,33.53 0 top
LOGO2  SFE_LOGO_NAME_FLAME.2_INCH  [SFE_LOGO_NAME_FLAME_.2]  14.16,26.54 90 bottom
LOGO3  SFE_LOGO_FLAME.1_INCH  [SFE_LOGO_FLAME_.1]  24.88,8.06 0 top
LOGO4  OSHW-LOGOS  [OSHW-LOGO-S]  45.47,33.53 0 top
LOGO5  SFE_LOGO_FLAME.1_INCH  [SFE_LOGO_FLAME_.1]  50.78,8.06 0 top
LOGO6  SFE_LOGO_NAME_FLAME.2_INCH  [SFE_LOGO_NAME_FLAME_.2]  40.07,26.54 90 bottom
LOGO7  OSHW-LOGOS  [OSHW-LOGO-S]  71.37,33.53 0 top
LOGO8  SFE_LOGO_FLAME.1_INCH  [SFE_LOGO_FLAME_.1]  76.69,8.06 0 top
LOGO9  SFE_LOGO_NAME_FLAME.2_INCH  [SFE_LOGO_NAME_FLAME_.2]  65.98,26.54 90 bottom
LOGO10  OSHW-LOGOS  [OSHW-LOGO-S]  97.28,33.53 0 top
LOGO11  SFE_LOGO_FLAME.1_INCH  [SFE_LOGO_FLAME_.1]  102.6,8.06 0 top
LOGO12  SFE_LOGO_NAME_FLAME.2_INCH  [SFE_LOGO_NAME_FLAME_.2]  91.88,26.54 90 bottom
LOGO13  OSHW-LOGOS  [OSHW-LOGO-S]  123.19,33.53 0 top
LOGO14  SFE_LOGO_FLAME.1_INCH  [SFE_LOGO_FLAME_.1]  128.51,8.06 0 top
LOGO15  SFE_LOGO_NAME_FLAME.2_INCH  [SFE_LOGO_NAME_FLAME_.2]  117.79,26.54 90 bottom
LOGO16  OSHW-LOGOS  [OSHW-LOGO-S]  19.56,86.61 0 top
LOGO17  SFE_LOGO_FLAME.1_INCH  [SFE_LOGO_FLAME_.1]  24.88,61.15 0 top
LOGO18  SFE_LOGO_NAME_FLAME.2_INCH  [SFE_LOGO_NAME_FLAME_.2]  14.16,79.63 90 bottom
LOGO19  OSHW-LOGOS  [OSHW-LOGO-S]  45.47,86.61 0 top
LOGO20  SFE_LOGO_FLAME.1_INCH  [SFE_LOGO_FLAME_.1]  50.78,61.15 0 top
LOGO21  SFE_LOGO_NAME_FLAME.2_INCH  [SFE_LOGO_NAME_FLAME_.2]  40.07,79.63 90 bottom
LOGO22  OSHW-LOGOS  [OSHW-LOGO-S]  71.37,86.61 0 top
LOGO23  SFE_LOGO_FLAME.1_INCH  [SFE_LOGO_FLAME_.1]  76.69,61.15 0 top
LOGO24  SFE_LOGO_NAME_FLAME.2_INCH  [SFE_LOGO_NAME_FLAME_.2]  65.98,79.63 90 bottom
LOGO25  OSHW-LOGOS  [OSHW-LOGO-S]  97.28,86.61 0 top
LOGO26  SFE_LOGO_FLAME.1_INCH  [SFE_LOGO_FLAME_.1]  102.6,61.15 0 top
LOGO27  SFE_LOGO_NAME_FLAME.2_INCH  [SFE_LOGO_NAME_FLAME_.2]  91.88,79.63 90 bottom
LOGO28  OSHW-LOGOS  [OSHW-LOGO-S]  123.19,86.61 0 top
LOGO29  SFE_LOGO_FLAME.1_INCH  [SFE_LOGO_FLAME_.1]  128.51,61.15 0 top
LOGO30  SFE_LOGO_NAME_FLAME.2_INCH  [SFE_LOGO_NAME_FLAME_.2]  117.79,79.63 90 bottom
LOGO31  OSHW-LOGOS  [OSHW-LOGO-S]  19.56,139.7 0 top
LOGO32  SFE_LOGO_FLAME.1_INCH  [SFE_LOGO_FLAME_.1]  24.88,114.24 0 top
LOGO33  SFE_LOGO_NAME_FLAME.2_INCH  [SFE_LOGO_NAME_FLAME_.2]  14.16,132.72 90 bottom
LOGO34  OSHW-LOGOS  [OSHW-LOGO-S]  45.47,139.7 0 top
LOGO35  SFE_LOGO_FLAME.1_INCH  [SFE_LOGO_FLAME_.1]  50.78,114.24 0 top
LOGO36  SFE_LOGO_NAME_FLAME.2_INCH  [SFE_LOGO_NAME_FLAME_.2]  40.07,132.72 90 bottom
LOGO37  OSHW-LOGOS  [OSHW-LOGO-S]  71.37,139.7 0 top
LOGO38  SFE_LOGO_FLAME.1_INCH  [SFE_LOGO_FLAME_.1]  76.69,114.24 0 top
LOGO39  SFE_LOGO_NAME_FLAME.2_INCH  [SFE_LOGO_NAME_FLAME_.2]  65.98,132.72 90 bottom
LOGO40  OSHW-LOGOS  [OSHW-LOGO-S]  97.28,139.7 0 top
LOGO41  SFE_LOGO_FLAME.1_INCH  [SFE_LOGO_FLAME_.1]  102.6,114.24 0 top
LOGO42  SFE_LOGO_NAME_FLAME.2_INCH  [SFE_LOGO_NAME_FLAME_.2]  91.88,132.72 90 bottom
LOGO43  OSHW-LOGOS  [OSHW-LOGO-S]  123.19,139.7 0 top
LOGO44  SFE_LOGO_FLAME.1_INCH  [SFE_LOGO_FLAME_.1]  128.51,114.24 0 top
LOGO45  SFE_LOGO_NAME_FLAME.2_INCH  [SFE_LOGO_NAME_FLAME_.2]  117.79,132.72 90 bottom
LOGO46  OSHW-LOGOS  [OSHW-LOGO-S]  19.56,192.79 0 top
LOGO47  SFE_LOGO_FLAME.1_INCH  [SFE_LOGO_FLAME_.1]  24.88,167.32 0 top
LOGO48  SFE_LOGO_NAME_FLAME.2_INCH  [SFE_LOGO_NAME_FLAME_.2]  14.16,185.8 90 bottom
LOGO49  OSHW-LOGOS  [OSHW-LOGO-S]  45.47,192.79 0 top
LOGO50  SFE_LOGO_FLAME.1_INCH  [SFE_LOGO_FLAME_.1]  50.78,167.32 0 top
LOGO51  SFE_LOGO_NAME_FLAME.2_INCH  [SFE_LOGO_NAME_FLAME_.2]  40.07,185.8 90 bottom
LOGO52  OSHW-LOGOS  [OSHW-LOGO-S]  71.37,192.79 0 top
LOGO53  SFE_LOGO_FLAME.1_INCH  [SFE_LOGO_FLAME_.1]  76.69,167.32 0 top
LOGO54  SFE_LOGO_NAME_FLAME.2_INCH  [SFE_LOGO_NAME_FLAME_.2]  65.98,185.8 90 bottom
LOGO55  OSHW-LOGOS  [OSHW-LOGO-S]  97.28,192.79 0 top
LOGO56  SFE_LOGO_FLAME.1_INCH  [SFE_LOGO_FLAME_.1]  102.6,167.32 0 top
LOGO57  SFE_LOGO_NAME_FLAME.2_INCH  [SFE_LOGO_NAME_FLAME_.2]  91.88,185.8 90 bottom
LOGO58  OSHW-LOGOS  [OSHW-LOGO-S]  123.19,192.79 0 top
LOGO59  SFE_LOGO_FLAME.1_INCH  [SFE_LOGO_FLAME_.1]  128.51,167.32 0 top
LOGO60  SFE_LOGO_NAME_FLAME.2_INCH  [SFE_LOGO_NAME_FLAME_.2]  117.79,185.8 90 bottom
LOGO61  OSHW-LOGOS  [OSHW-LOGO-S]  19.56,245.87 0 top
LOGO62  SFE_LOGO_FLAME.1_INCH  [SFE_LOGO_FLAME_.1]  24.88,220.41 0 top
LOGO63  SFE_LOGO_NAME_FLAME.2_INCH  [SFE_LOGO_NAME_FLAME_.2]  14.16,238.89 90 bottom
LOGO64  OSHW-LOGOS  [OSHW-LOGO-S]  45.47,245.87 0 top
LOGO65  SFE_LOGO_FLAME.1_INCH  [SFE_LOGO_FLAME_.1]  50.78,220.41 0 top
LOGO66  SFE_LOGO_NAME_FLAME.2_INCH  [SFE_LOGO_NAME_FLAME_.2]  40.07,238.89 90 bottom
LOGO67  OSHW-LOGOS  [OSHW-LOGO-S]  71.37,245.87 0 top
LOGO68  SFE_LOGO_FLAME.1_INCH  [SFE_LOGO_FLAME_.1]  76.69,220.41 0 top
LOGO69  SFE_LOGO_NAME_FLAME.2_INCH  [SFE_LOGO_NAME_FLAME_.2]  65.98,238.89 90 bottom
LOGO70  OSHW-LOGOS  [OSHW-LOGO-S]  97.28,245.87 0 top
LOGO71  SFE_LOGO_FLAME.1_INCH  [SFE_LOGO_FLAME_.1]  102.6,220.41 0 top
LOGO72  SFE_LOGO_NAME_FLAME.2_INCH  [SFE_LOGO_NAME_FLAME_.2]  91.88,238.89 90 bottom
LOGO73  OSHW-LOGOS  [OSHW-LOGO-S]  123.19,245.87 0 top
LOGO74  SFE_LOGO_FLAME.1_INCH  [SFE_LOGO_FLAME_.1]  128.51,220.41 0 top
LOGO75  SFE_LOGO_NAME_FLAME.2_INCH  [SFE_LOGO_NAME_FLAME_.2]  117.79,238.89 90 bottom
R1  470  [0603]  13.21,13.6 90 top
R2  10k  [0603]  19.64,37.26 270 top
R3  100K  [0402]  16.86,37.58 270 top
R4  10k  [0603]  23.37,37.34 180 top
R5  10k  [0603]  15.46,37.34 270 top
R6  100K  [0402]  42.77,37.58 270 top
R7  100K  [0402]  18.21,36.86 270 top
R8  100K  [0402]  44.12,36.86 270 top
R9  10k  [0603]  19.8,20.83 270 top
R10  10k  [0603]  16.94,21.07 270 top
R11  10k  [0603]  18.37,20.83 270 top
R12  10k  [0603]  15.51,21.07 270 top
R13  4.7k  [0603]  23.69,33.45 90 top
R14  4.7k  [0603]  25.19,33.45 90 top
R15  470  [0603]  39.12,13.6 90 top
R16  10k  [0603]  45.7,20.83 270 top
R17  10k  [0603]  42.85,21.07 270 top
R18  10k  [0603]  44.28,20.83 270 top
R19  10k  [0603]  41.42,21.07 270 top
R20  4.7k  [0603]  49.59,33.45 90 top
R21  4.7k  [0603]  51.1,33.45 90 top
R22  10k  [0603]  45.55,37.26 270 top
R23  10k  [0603]  49.28,37.34 180 top
R24  10k  [0603]  41.37,37.34 270 top
R25  100K  [0402]  68.68,37.58 270 top
R26  100K  [0402]  70.02,36.86 270 top
R27  470  [0603]  65.02,13.6 90 top
R28  10k  [0603]  71.61,20.83 270 top
R29  10k  [0603]  68.75,21.07 270 top
R30  10k  [0603]  70.18,20.83 270 top
R31  10k  [0603]  67.33,21.07 270 top
R32  4.7k  [0603]  75.5,33.45 90 top
R33  4.7k  [0603]  77.01,33.45 90 top
R34  10k  [0603]  71.45,37.26 270 top
R35  10k  [0603]  75.18,37.34 180 top
R36  10k  [0603]  67.28,37.34 270 top
R37  100K  [0402]  94.58,37.58 270 top
R38  100K  [0402]  95.93,36.86 270 top
R39  470  [0603]  90.93,13.6 90 top
R40  10k  [0603]  97.52,20.83 270 top
R41  10k  [0603]  94.66,21.07 270 top
R42  10k  [0603]  96.09,20.83 270 top
R43  10k  [0603]  93.23,21.07 270 top
R44  4.7k  [0603]  101.41,33.45 90 top
R45  4.7k  [0603]  102.92,33.45 90 top
R46  10k  [0603]  97.36,37.26 270 top
R47  10k  [0603]  101.09,37.34 180 top
R48  10k  [0603]  93.19,37.34 270 top
R49  100K  [0402]  120.49,37.58 270 top
R50  100K  [0402]  121.84,36.86 270 top
R51  470  [0603]  116.84,13.6 90 top
R52  10k  [0603]  123.43,20.83 270 top
R53  10k  [0603]  120.57,21.07 270 top
R54  10k  [0603]  122,20.83 270 top
R55  10k  [0603]  119.14,21.07 270 top
R56  4.7k  [0603]  127.32,33.45 90 top
R57  4.7k  [0603]  128.83,33.45 90 top
R58  10k  [0603]  123.27,37.26 270 top
R59  10k  [0603]  127,37.34 180 top
R60  10k  [0603]  119.09,37.34 270 top
R61  100K  [0402]  16.86,90.66 270 top
R62  100K  [0402]  18.21,89.95 270 top
R63  470  [0603]  13.21,66.69 90 top
R64  10k  [0603]  19.8,73.91 270 top
R65  10k  [0603]  16.94,74.15 270 top
R66  10k  [0603]  18.37,73.91 270 top
R67  10k  [0603]  15.51,74.15 270 top
R68  4.7k  [0603]  23.69,86.53 90 top
R69  4.7k  [0603]  25.19,86.53 90 top
R70  10k  [0603]  19.64,90.34 270 top
R71  10k  [0603]  23.37,90.42 180 top
R72  10k  [0603]  15.46,90.42 270 top
R73  100K  [0402]  42.77,90.66 270 top
R74  100K  [0402]  44.12,89.95 270 top
R75  470  [0603]  39.12,66.69 90 top
R76  10k  [0603]  45.7,73.91 270 top
R77  10k  [0603]  42.85,74.15 270 top
R78  10k  [0603]  44.28,73.91 270 top
R79  10k  [0603]  41.42,74.15 270 top
R80  4.7k  [0603]  49.59,86.53 90 top
R81  4.7k  [0603]  51.1,86.53 90 top
R82  10k  [0603]  45.55,90.34 270 top
R83  10k  [0603]  49.28,90.42 180 top
R84  10k  [0603]  41.37,90.42 270 top
R85  100K  [0402]  68.68,90.66 270 top
R86  100K  [0402]  70.02,89.95 270 top
R87  470  [0603]  65.02,66.69 90 top
R88  10k  [0603]  71.61,73.91 270 top
R89  10k  [0603]  68.75,74.15 270 top
R90  10k  [0603]  70.18,73.91 270 top
R91  10k  [0603]  67.33,74.15 270 top
R92  4.7k  [0603]  75.5,86.53 90 top
R93  4.7k  [0603]  77.01,86.53 90 top
R94  10k  [0603]  71.45,90.34 270 top
R95  10k  [0603]  75.18,90.42 180 top
R96  10k  [0603]  67.28,90.42 270 top
R97  100K  [0402]  94.58,90.66 270 top
R98  100K  [0402]  95.93,89.95 270 top
R99  470  [0603]  90.93,66.69 90 top
R100  10k  [0603]  97.52,73.91 270 top
R101  10k  [0603]  94.66,74.15 270 top
R102  10k  [0603]  96.09,73.91 270 top
R103  10k  [0603]  93.23,74.15 270 top
R104  4.7k  [0603]  101.41,86.53 90 top
R105  4.7k  [0603]  102.92,86.53 90 top
R106  10k  [0603]  97.36,90.34 270 top
R107  10k  [0603]  101.09,90.42 180 top
R108  10k  [0603]  93.19,90.42 270 top
R109  100K  [0402]  120.49,90.66 270 top
R110  100K  [0402]  121.84,89.95 270 top
R111  470  [0603]  116.84,66.69 90 top
R112  10k  [0603]  123.43,73.91 270 top
R113  10k  [0603]  120.57,74.15 270 top
R114  10k  [0603]  122,73.91 270 top
R115  10k  [0603]  119.14,74.15 270 top
R116  4.7k  [0603]  127.32,86.53 90 top
R117  4.7k  [0603]  128.83,86.53 90 top
R118  10k  [0603]  123.27,90.34 270 top
R119  10k  [0603]  127,90.42 180 top
R120  10k  [0603]  119.09,90.42 270 top
R121  100K  [0402]  16.86,143.75 270 top
R122  100K  [0402]  18.21,143.03 270 top
R123  470  [0603]  13.21,119.78 90 top
R124  10k  [0603]  19.8,127 270 top
R125  10k  [0603]  16.94,127.24 270 top
R126  10k  [0603]  18.37,127 270 top
R127  10k  [0603]  15.51,127.24 270 top
R128  4.7k  [0603]  23.69,139.62 90 top
R129  4.7k  [0603]  25.19,139.62 90 top
R130  10k  [0603]  19.64,143.43 270 top
R131  10k  [0603]  23.37,143.51 180 top
R132  10k  [0603]  15.46,143.51 270 top
R133  100K  [0402]  42.77,143.75 270 top
R134  100K  [0402]  44.12,143.03 270 top
R135  470  [0603]  39.12,119.78 90 top
R136  10k  [0603]  45.7,127 270 top
R137  10k  [0603]  42.85,127.24 270 top
R138  10k  [0603]  44.28,127 270 top
R139  10k  [0603]  41.42,127.24 270 top
R140  4.7k  [0603]  49.59,139.62 90 top
R141  4.7k  [0603]  51.1,139.62 90 top
R142  10k  [0603]  45.55,143.43 270 top
R143  10k  [0603]  49.28,143.51 180 top
R144  10k  [0603]  41.37,143.51 270 top
R145  100K  [0402]  68.68,143.75 270 top
R146  100K  [0402]  70.02,143.03 270 top
R147  470  [0603]  65.02,119.78 90 top
R148  10k  [0603]  71.61,127 270 top
R149  10k  [0603]  68.75,127.24 270 top
R150  10k  [0603]  70.18,127 270 top
R151  10k  [0603]  67.33,127.24 270 top
R152  4.7k  [0603]  75.5,139.62 90 top
R153  4.7k  [0603]  77.01,139.62 90 top
R154  10k  [0603]  71.45,143.43 270 top
R155  10k  [0603]  75.18,143.51 180 top
R156  10k  [0603]  67.28,143.51 270 top
R157  100K  [0402]  94.58,143.75 270 top
R158  100K  [0402]  95.93,143.03 270 top
R159  470  [0603]  90.93,119.78 90 top
R160  10k  [0603]  97.52,127 270 top
R161  10k  [0603]  94.66,127.24 270 top
R162  10k  [0603]  96.09,127 270 top
R163  10k  [0603]  93.23,127.24 270 top
R164  4.7k  [0603]  101.41,139.62 90 top
R165  4.7k  [0603]  102.92,139.62 90 top
R166  10k  [0603]  97.36,143.43 270 top
R167  10k  [0603]  101.09,143.51 180 top
R168  10k  [0603]  93.19,143.51 270 top
R169  100K  [0402]  120.49,143.75 270 top
R170  100K  [0402]  121.84,143.03 270 top
R171  470  [0603]  116.84,119.78 90 top
R172  10k  [0603]  123.43,127 270 top
R173  10k  [0603]  120.57,127.24 270 top
R174  10k  [0603]  122,127 270 top
R175  10k  [0603]  119.14,127.24 270 top
R176  4.7k  [0603]  127.32,139.62 90 top
R177  4.7k  [0603]  128.83,139.62 90 top
R178  10k  [0603]  123.27,143.43 270 top
R179  10k  [0603]  127,143.51 180 top
R180  10k  [0603]  119.09,143.51 270 top
R181  100K  [0402]  16.86,196.83 270 top
R182  100K  [0402]  18.21,196.12 270 top
R183  470  [0603]  13.21,172.86 90 top
R184  10k  [0603]  19.8,180.09 270 top
R185  10k  [0603]  16.94,180.32 270 top
R186  10k  [0603]  18.37,180.09 270 top
R187  10k  [0603]  15.51,180.32 270 top
R188  4.7k  [0603]  23.69,192.71 90 top
R189  4.7k  [0603]  25.19,192.71 90 top
R190  10k  [0603]  19.64,196.52 270 top
R191  10k  [0603]  23.37,196.6 180 top
R192  10k  [0603]  15.46,196.6 270 top
R193  100K  [0402]  42.77,196.83 270 top
R194  100K  [0402]  44.12,196.12 270 top
R195  470  [0603]  39.12,172.86 90 top
R196  10k  [0603]  45.7,180.09 270 top
R197  10k  [0603]  42.85,180.32 270 top
R198  10k  [0603]  44.28,180.09 270 top
R199  10k  [0603]  41.42,180.32 270 top
R200  4.7k  [0603]  49.59,192.71 90 top
R201  4.7k  [0603]  51.1,192.71 90 top
R202  10k  [0603]  45.55,196.52 270 top
R203  10k  [0603]  49.28,196.6 180 top
R204  10k  [0603]  41.37,196.6 270 top
R205  100K  [0402]  68.68,196.83 270 top
R206  100K  [0402]  70.02,196.12 270 top
R207  470  [0603]  65.02,172.86 90 top
R208  10k  [0603]  71.61,180.09 270 top
R209  10k  [0603]  68.75,180.32 270 top
R210  10k  [0603]  70.18,180.09 270 top
R211  10k  [0603]  67.33,180.32 270 top
R212  4.7k  [0603]  75.5,192.71 90 top
R213  4.7k  [0603]  77.01,192.71 90 top
R214  10k  [0603]  71.45,196.52 270 top
R215  10k  [0603]  75.18,196.6 180 top
R216  10k  [0603]  67.28,196.6 270 top
R217  100K  [0402]  94.58,196.83 270 top
R218  100K  [0402]  95.93,196.12 270 top
R219  470  [0603]  90.93,172.86 90 top
R220  10k  [0603]  97.52,180.09 270 top
R221  10k  [0603]  94.66,180.32 270 top
R222  10k  [0603]  96.09,180.09 270 top
R223  10k  [0603]  93.23,180.32 270 top
R224  4.7k  [0603]  101.41,192.71 90 top
R225  4.7k  [0603]  102.92,192.71 90 top
R226  10k  [0603]  97.36,196.52 270 top
R227  10k  [0603]  101.09,196.6 180 top
R228  10k  [0603]  93.19,196.6 270 top
R229  100K  [0402]  120.49,196.83 270 top
R230  100K  [0402]  121.84,196.12 270 top
R231  470  [0603]  116.84,172.86 90 top
R232  10k  [0603]  123.43,180.09 270 top
R233  10k  [0603]  120.57,180.32 270 top
R234  10k  [0603]  122,180.09 270 top
R235  10k  [0603]  119.14,180.32 270 top
R236  4.7k  [0603]  127.32,192.71 90 top
R237  4.7k  [0603]  128.83,192.71 90 top
R238  10k  [0603]  123.27,196.52 270 top
R239  10k  [0603]  127,196.6 180 top
R240  10k  [0603]  119.09,196.6 270 top
R241  100K  [0402]  16.86,249.92 270 top
R242  100K  [0402]  18.21,249.21 270 top
R243  470  [0603]  13.21,225.95 90 top
R244  10k  [0603]  19.8,233.17 270 top
R245  10k  [0603]  16.94,233.41 270 top
R246  10k  [0603]  18.37,233.17 270 top
R247  10k  [0603]  15.51,233.41 270 top
R248  4.7k  [0603]  23.69,245.79 90 top
R249  4.7k  [0603]  25.19,245.79 90 top
R250  10k  [0603]  19.64,249.6 270 top
R251  10k  [0603]  23.37,249.68 180 top
R252  10k  [0603]  15.46,249.68 270 top
R253  100K  [0402]  42.77,249.92 270 top
R254  100K  [0402]  44.12,249.21 270 top
R255  470  [0603]  39.12,225.95 90 top
R256  10k  [0603]  45.7,233.17 270 top
R257  10k  [0603]  42.85,233.41 270 top
R258  10k  [0603]  44.28,233.17 270 top
R259  10k  [0603]  41.42,233.41 270 top
R260  4.7k  [0603]  49.59,245.79 90 top
R261  4.7k  [0603]  51.1,245.79 90 top
R262  10k  [0603]  45.55,249.6 270 top
R263  10k  [0603]  49.28,249.68 180 top
R264  10k  [0603]  41.37,249.68 270 top
R265  100K  [0402]  68.68,249.92 270 top
R266  100K  [0402]  70.02,249.21 270 top
R267  470  [0603]  65.02,225.95 90 top
R268  10k  [0603]  71.61,233.17 270 top
R269  10k  [0603]  68.75,233.41 270 top
R270  10k  [0603]  70.18,233.17 270 top
R271  10k  [0603]  67.33,233.41 270 top
R272  4.7k  [0603]  75.5,245.79 90 top
R273  4.7k  [0603]  77.01,245.79 90 top
R274  10k  [0603]  71.45,249.6 270 top
R275  10k  [0603]  75.18,249.68 180 top
R276  10k  [0603]  67.28,249.68 270 top
R277  100K  [0402]  94.58,249.92 270 top
R278  100K  [0402]  95.93,249.21 270 top
R279  470  [0603]  90.93,225.95 90 top
R280  10k  [0603]  97.52,233.17 270 top
R281  10k  [0603]  94.66,233.41 270 top
R282  10k  [0603]  96.09,233.17 270 top
R283  10k  [0603]  93.23,233.41 270 top
R284  4.7k  [0603]  101.41,245.79 90 top
R285  4.7k  [0603]  102.92,245.79 90 top
R286  10k  [0603]  97.36,249.6 270 top
R287  10k  [0603]  101.09,249.68 180 top
R288  10k  [0603]  93.19,249.68 270 top
R289  100K  [0402]  120.49,249.92 270 top
R290  100K  [0402]  121.84,249.21 270 top
R291  470  [0603]  116.84,225.95 90 top
R292  10k  [0603]  123.43,233.17 270 top
R293  10k  [0603]  120.57,233.41 270 top
R294  10k  [0603]  122,233.17 270 top
R295  10k  [0603]  119.14,233.41 270 top
R296  4.7k  [0603]  127.32,245.79 90 top
R297  4.7k  [0603]  128.83,245.79 90 top
R298  10k  [0603]  123.27,249.6 270 top
R299  10k  [0603]  127,249.68 180 top
R300  10k  [0603]  119.09,249.68 270 top
TP1  TEST-POINT3  [PAD.03X.03]  24.64,22.1 90 top
TP2  TEST-POINT3  [PAD.03X.03]  24.64,23.37 90 top
TP3  TEST-POINT3  [PAD.03X.03]  24.64,24.64 90 top
TP4  TEST-POINT3  [PAD.03X.03]  22.1,22.1 90 top
TP5  TEST-POINT3  [PAD.03X.03]  23.37,22.1 90 top
TP6  TEST-POINT3  [PAD.03X.03]  50.55,22.1 90 top
TP7  TEST-POINT3  [PAD.03X.03]  50.55,23.37 90 top
TP8  TEST-POINT3  [PAD.03X.03]  50.55,24.64 90 top
TP9  TEST-POINT3  [PAD.03X.03]  48.01,22.1 90 top
TP10  TEST-POINT3  [PAD.03X.03]  49.28,22.1 90 top
TP11  TEST-POINT3  [PAD.03X.03]  76.45,22.1 90 top
TP12  TEST-POINT3  [PAD.03X.03]  76.45,23.37 90 top
TP13  TEST-POINT3  [PAD.03X.03]  76.45,24.64 90 top
TP14  TEST-POINT3  [PAD.03X.03]  73.91,22.1 90 top
TP15  TEST-POINT3  [PAD.03X.03]  75.18,22.1 90 top
TP16  TEST-POINT3  [PAD.03X.03]  102.36,22.1 90 top
TP17  TEST-POINT3  [PAD.03X.03]  102.36,23.37 90 top
TP18  TEST-POINT3  [PAD.03X.03]  102.36,24.64 90 top
TP19  TEST-POINT3  [PAD.03X.03]  99.82,22.1 90 top
TP20  TEST-POINT3  [PAD.03X.03]  101.09,22.1 90 top
TP21  TEST-POINT3  [PAD.03X.03]  128.27,22.1 90 top
TP22  TEST-POINT3  [PAD.03X.03]  128.27,23.37 90 top
TP23  TEST-POINT3  [PAD.03X.03]  128.27,24.64 90 top
TP24  TEST-POINT3  [PAD.03X.03]  125.73,22.1 90 top
TP25  TEST-POINT3  [PAD.03X.03]  127,22.1 90 top
TP26  TEST-POINT3  [PAD.03X.03]  24.64,75.18 90 top
TP27  TEST-POINT3  [PAD.03X.03]  24.64,76.45 90 top
TP28  TEST-POINT3  [PAD.03X.03]  24.64,77.72 90 top
TP29  TEST-POINT3  [PAD.03X.03]  22.1,75.18 90 top
TP30  TEST-POINT3  [PAD.03X.03]  23.37,75.18 90 top
TP31  TEST-POINT3  [PAD.03X.03]  50.55,75.18 90 top
TP32  TEST-POINT3  [PAD.03X.03]  50.55,76.45 90 top
TP33  TEST-POINT3  [PAD.03X.03]  50.55,77.72 90 top
TP34  TEST-POINT3  [PAD.03X.03]  48.01,75.18 90 top
TP35  TEST-POINT3  [PAD.03X.03]  49.28,75.18 90 top
TP36  TEST-POINT3  [PAD.03X.03]  76.45,75.18 90 top
TP37  TEST-POINT3  [PAD.03X.03]  76.45,76.45 90 top
TP38  TEST-POINT3  [PAD.03X.03]  76.45,77.72 90 top
TP39  TEST-POINT3  [PAD.03X.03]  73.91,75.18 90 top
TP40  TEST-POINT3  [PAD.03X.03]  75.18,75.18 90 top
TP41  TEST-POINT3  [PAD.03X.03]  102.36,75.18 90 top
TP42  TEST-POINT3  [PAD.03X.03]  102.36,76.45 90 top
TP43  TEST-POINT3  [PAD.03X.03]  102.36,77.72 90 top
TP44  TEST-POINT3  [PAD.03X.03]  99.82,75.18 90 top
TP45  TEST-POINT3  [PAD.03X.03]  101.09,75.18 90 top
TP46  TEST-POINT3  [PAD.03X.03]  128.27,75.18 90 top
TP47  TEST-POINT3  [PAD.03X.03]  128.27,76.45 90 top
TP48  TEST-POINT3  [PAD.03X.03]  128.27,77.72 90 top
TP49  TEST-POINT3  [PAD.03X.03]  125.73,75.18 90 top
TP50  TEST-POINT3  [PAD.03X.03]  127,75.18 90 top
TP51  TEST-POINT3  [PAD.03X.03]  24.64,128.27 90 top
TP52  TEST-POINT3  [PAD.03X.03]  24.64,129.54 90 top
TP53  TEST-POINT3  [PAD.03X.03]  24.64,130.81 90 top
TP54  TEST-POINT3  [PAD.03X.03]  22.1,128.27 90 top
TP55  TEST-POINT3  [PAD.03X.03]  23.37,128.27 90 top
TP56  TEST-POINT3  [PAD.03X.03]  50.55,128.27 90 top
TP57  TEST-POINT3  [PAD.03X.03]  50.55,129.54 90 top
TP58  TEST-POINT3  [PAD.03X.03]  50.55,130.81 90 top
TP59  TEST-POINT3  [PAD.03X.03]  48.01,128.27 90 top
TP60  TEST-POINT3  [PAD.03X.03]  49.28,128.27 90 top
TP61  TEST-POINT3  [PAD.03X.03]  76.45,128.27 90 top
TP62  TEST-POINT3  [PAD.03X.03]  76.45,129.54 90 top
TP63  TEST-POINT3  [PAD.03X.03]  76.45,130.81 90 top
TP64  TEST-POINT3  [PAD.03X.03]  73.91,128.27 90 top
TP65  TEST-POINT3  [PAD.03X.03]  75.18,128.27 90 top
TP66  TEST-POINT3  [PAD.03X.03]  102.36,128.27 90 top
TP67  TEST-POINT3  [PAD.03X.03]  102.36,129.54 90 top
TP68  TEST-POINT3  [PAD.03X.03]  102.36,130.81 90 top
TP69  TEST-POINT3  [PAD.03X.03]  99.82,128.27 90 top
TP70  TEST-POINT3  [PAD.03X.03]  101.09,128.27 90 top
TP71  TEST-POINT3  [PAD.03X.03]  128.27,128.27 90 top
TP72  TEST-POINT3  [PAD.03X.03]  128.27,129.54 90 top
TP73  TEST-POINT3  [PAD.03X.03]  128.27,130.81 90 top
TP74  TEST-POINT3  [PAD.03X.03]  125.73,128.27 90 top
TP75  TEST-POINT3  [PAD.03X.03]  127,128.27 90 top
TP76  TEST-POINT3  [PAD.03X.03]  24.64,181.36 90 top
TP77  TEST-POINT3  [PAD.03X.03]  24.64,182.63 90 top
TP78  TEST-POINT3  [PAD.03X.03]  24.64,183.9 90 top
TP79  TEST-POINT3  [PAD.03X.03]  22.1,181.36 90 top
TP80  TEST-POINT3  [PAD.03X.03]  23.37,181.36 90 top
TP81  TEST-POINT3  [PAD.03X.03]  50.55,181.36 90 top
TP82  TEST-POINT3  [PAD.03X.03]  50.55,182.63 90 top
TP83  TEST-POINT3  [PAD.03X.03]  50.55,183.9 90 top
TP84  TEST-POINT3  [PAD.03X.03]  48.01,181.36 90 top
TP85  TEST-POINT3  [PAD.03X.03]  49.28,181.36 90 top
TP86  TEST-POINT3  [PAD.03X.03]  76.45,181.36 90 top
TP87  TEST-POINT3  [PAD.03X.03]  76.45,182.63 90 top
TP88  TEST-POINT3  [PAD.03X.03]  76.45,183.9 90 top
TP89  TEST-POINT3  [PAD.03X.03]  73.91,181.36 90 top
TP90  TEST-POINT3  [PAD.03X.03]  75.18,181.36 90 top
TP91  TEST-POINT3  [PAD.03X.03]  102.36,181.36 90 top
TP92  TEST-POINT3  [PAD.03X.03]  102.36,182.63 90 top
TP93  TEST-POINT3  [PAD.03X.03]  102.36,183.9 90 top
TP94  TEST-POINT3  [PAD.03X.03]  99.82,181.36 90 top
TP95  TEST-POINT3  [PAD.03X.03]  101.09,181.36 90 top
TP96  TEST-POINT3  [PAD.03X.03]  128.27,181.36 90 top
TP97  TEST-POINT3  [PAD.03X.03]  128.27,182.63 90 top
TP98  TEST-POINT3  [PAD.03X.03]  128.27,183.9 90 top
TP99  TEST-POINT3  [PAD.03X.03]  125.73,181.36 90 top
TP100  TEST-POINT3  [PAD.03X.03]  127,181.36 90 top
TP101  TEST-POINT3  [PAD.03X.03]  24.64,234.44 90 top
TP102  TEST-POINT3  [PAD.03X.03]  24.64,235.71 90 top
TP103  TEST-POINT3  [PAD.03X.03]  24.64,236.98 90 top
TP104  TEST-POINT3  [PAD.03X.03]  22.1,234.44 90 top
TP105  TEST-POINT3  [PAD.03X.03]  23.37,234.44 90 top
TP106  TEST-POINT3  [PAD.03X.03]  50.55,234.44 90 top
TP107  TEST-POINT3  [PAD.03X.03]  50.55,235.71 90 top
TP108  TEST-POINT3  [PAD.03X.03]  50.55,236.98 90 top
TP109  TEST-POINT3  [PAD.03X.03]  48.01,234.44 90 top
TP110  TEST-POINT3  [PAD.03X.03]  49.28,234.44 90 top
TP111  TEST-POINT3  [PAD.03X.03]  76.45,234.44 90 top
TP112  TEST-POINT3  [PAD.03X.03]  76.45,235.71 90 top
TP113  TEST-POINT3  [PAD.03X.03]  76.45,236.98 90 top
TP114  TEST-POINT3  [PAD.03X.03]  73.91,234.44 90 top
TP115  TEST-POINT3  [PAD.03X.03]  75.18,234.44 90 top
TP116  TEST-POINT3  [PAD.03X.03]  102.36,234.44 90 top
TP117  TEST-POINT3  [PAD.03X.03]  102.36,235.71 90 top
TP118  TEST-POINT3  [PAD.03X.03]  102.36,236.98 90 top
TP119  TEST-POINT3  [PAD.03X.03]  99.82,234.44 90 top
TP120  TEST-POINT3  [PAD.03X.03]  101.09,234.44 90 top
TP121  TEST-POINT3  [PAD.03X.03]  128.27,234.44 90 top
TP122  TEST-POINT3  [PAD.03X.03]  128.27,235.71 90 top
TP123  TEST-POINT3  [PAD.03X.03]  128.27,236.98 90 top
TP124  TEST-POINT3  [PAD.03X.03]  125.73,234.44 90 top
TP125  TEST-POINT3  [PAD.03X.03]  127,234.44 90 top
U1  LSM9DS1  [LGA-24-3.5X3]  19.56,25.91 0 top
U2  LSM9DS1  [LGA-24-3.5X3]  45.47,25.91 0 top
U3  LSM9DS1  [LGA-24-3.5X3]  71.37,25.91 0 top
U4  LSM9DS1  [LGA-24-3.5X3]  97.28,25.91 0 top
U5  LSM9DS1  [LGA-24-3.5X3]  123.19,25.91 0 top
U6  LSM9DS1  [LGA-24-3.5X3]  19.56,78.99 0 top
U7  LSM9DS1  [LGA-24-3.5X3]  45.47,78.99 0 top
U8  LSM9DS1  [LGA-24-3.5X3]  71.37,78.99 0 top
U9  LSM9DS1  [LGA-24-3.5X3]  97.28,78.99 0 top
U10  LSM9DS1  [LGA-24-3.5X3]  123.19,78.99 0 top
U11  LSM9DS1  [LGA-24-3.5X3]  19.56,132.08 0 top
U12  LSM9DS1  [LGA-24-3.5X3]  45.47,132.08 0 top
U13  LSM9DS1  [LGA-24-3.5X3]  71.37,132.08 0 top
U14  LSM9DS1  [LGA-24-3.5X3]  97.28,132.08 0 top
U15  LSM9DS1  [LGA-24-3.5X3]  123.19,132.08 0 top
U16  LSM9DS1  [LGA-24-3.5X3]  19.56,185.17 0 top
U17  LSM9DS1  [LGA-24-3.5X3]  45.47,185.17 0 top
U18  LSM9DS1  [LGA-24-3.5X3]  71.37,185.17 0 top
U19  LSM9DS1  [LGA-24-3.5X3]  97.28,185.17 0 top
U20  LSM9DS1  [LGA-24-3.5X3]  123.19,185.17 0 top
U21  LSM9DS1  [LGA-24-3.5X3]  19.56,238.25 0 top
U22  LSM9DS1  [LGA-24-3.5X3]  45.47,238.25 0 top
U23  LSM9DS1  [LGA-24-3.5X3]  71.37,238.25 0 top
U24  LSM9DS1  [LGA-24-3.5X3]  97.28,238.25 0 top
U25  LSM9DS1  [LGA-24-3.5X3]  123.19,238.25 0 top